# Altium PCB dimmer_v2.PcbDoc
Units mm, origin at the board's own origin, x right, y up, seen from the top; angles counter-clockwise.
Board outline 32.8 x 86.9 mm, 4 copper layers (Top Layer, Layer 2, Layer 3, Bottom Layer), stack 1.369 mm thick; 45 components, 35 nets, 167 pads, 18 vias.
Unrouted connection lines stored in the file: 68.
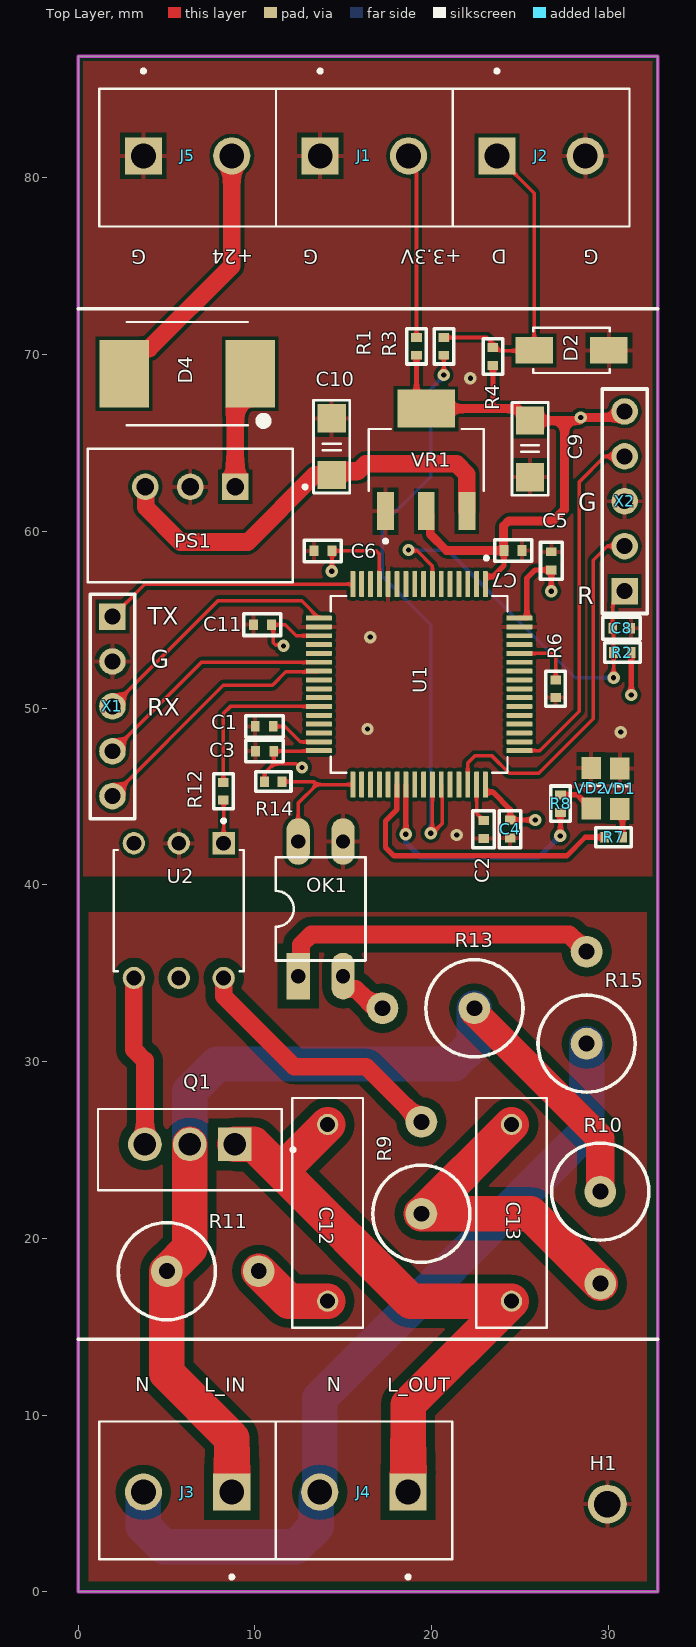
[diagram p0: Top Layer view]
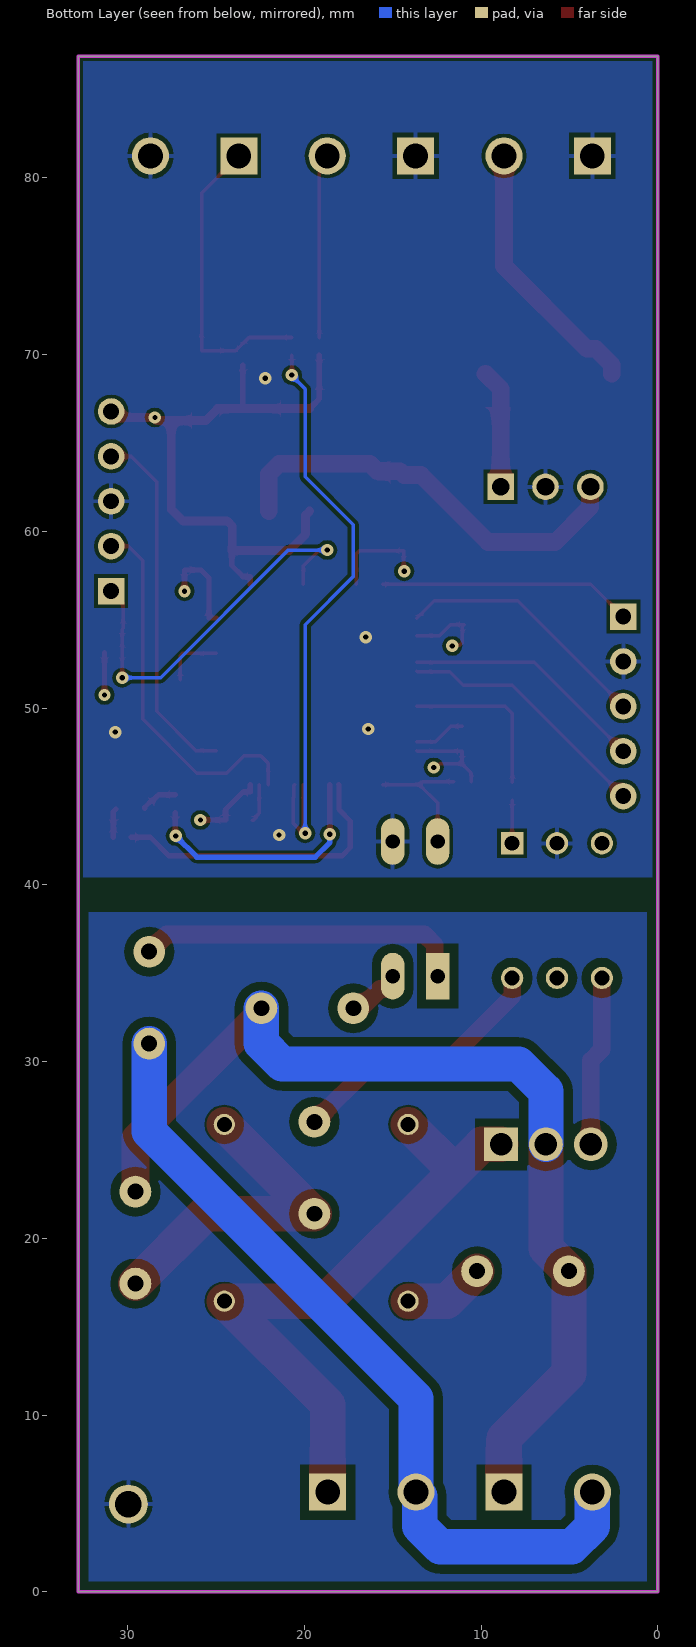
[diagram p1: Bottom Layer view, seen from below]
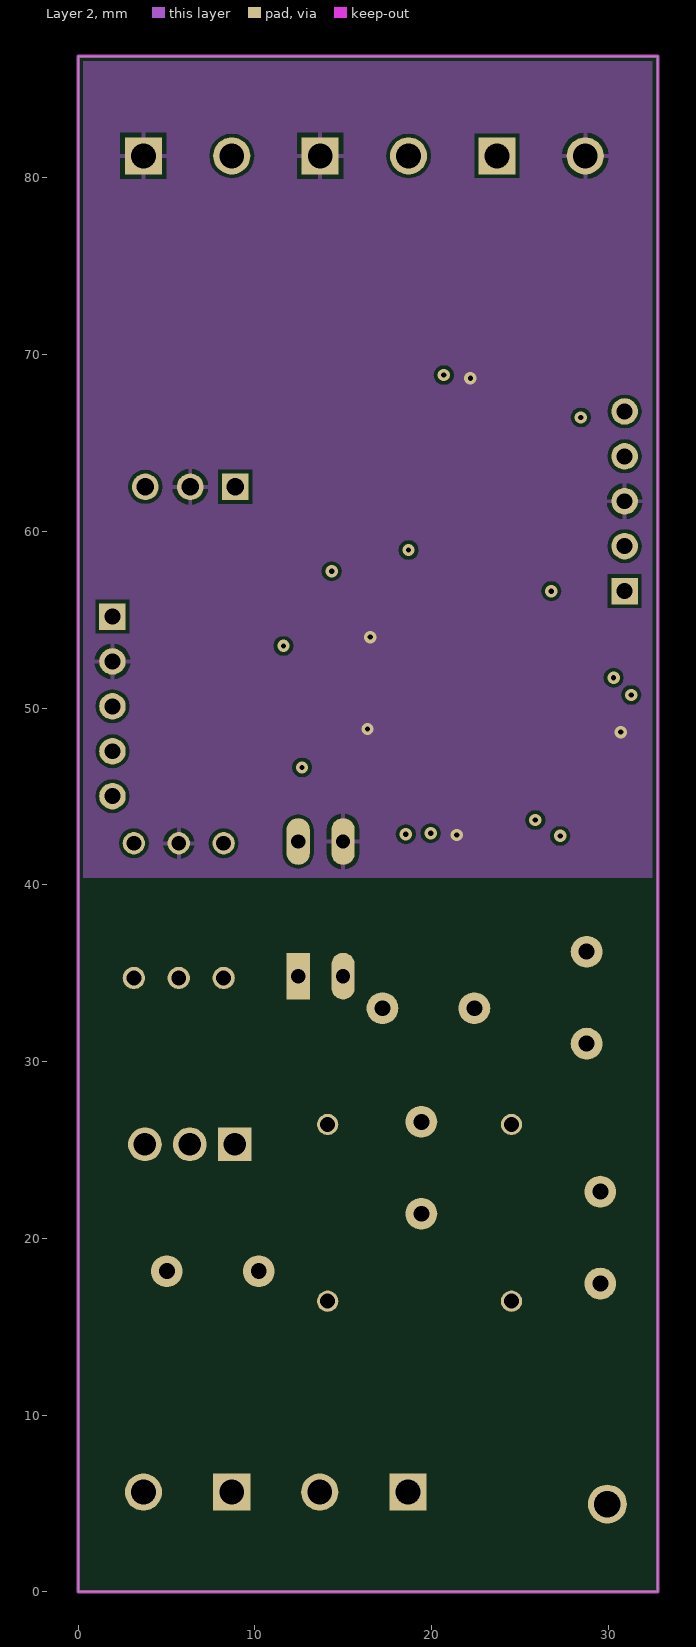
[diagram p2: Layer 2]
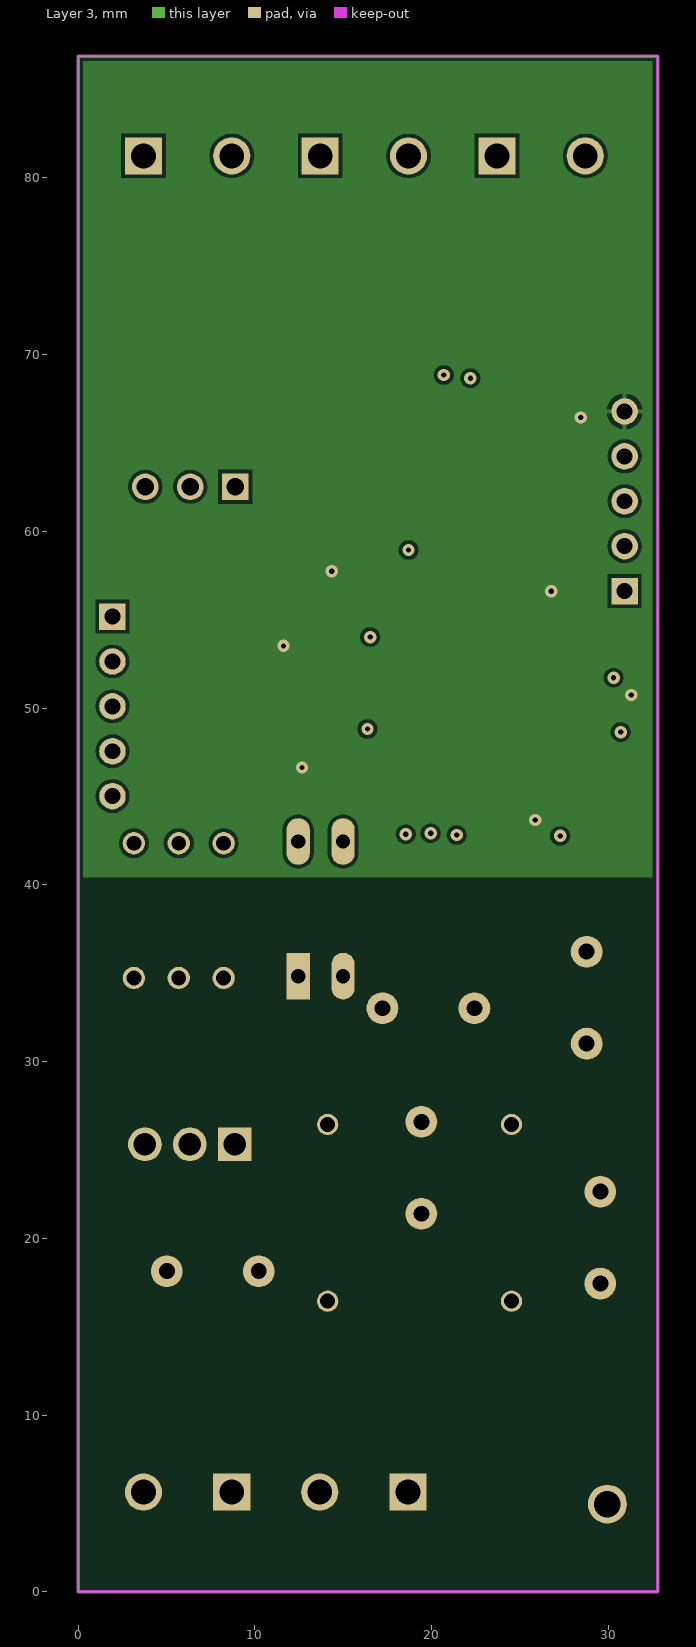
[diagram p3: Layer 3]

## Layer stack, top to bottom
Top Solder: solder mask 0.0254, SM-001, Dk 4
Top Layer: signal copper 0.035
Dielectric 1: prepreg 0.1295, PP-017, Dk 4.3
Dielectric 2: prepreg 0.1295, PP-017, Dk 4.3
Layer 2: signal copper 0.035
Dielectric 3: core 0.7112, Core-039, Dk 4.8
Layer 3: signal copper 0.035
Dielectric 4: prepreg 0.1295, PP-017, Dk 4.3
Dielectric 5: prepreg 0.1295, PP-017, Dk 4.3
Bottom Layer: signal copper 0.035
Bottom Solder: solder mask 0.0254, SM-001, Dk 4

## Board outline
0,0 0,86.9 32.8,86.9 32.8,0

## Design rules (kind name [scope] priority, off if disabled: settings)
Clearance Clearance_1 [InNet('pwr_gnd')] p1: gap=0.5 ignorepadtopadclearanceinfootprint=FALSE
Clearance [All] p2: gap=0.2 ignorepadtopadclearanceinfootprint=FALSE
ComponentClearance [InComponentClass('J*') vs InComponentClass('J*')] p1: gap=0.01 collisioncheckmode=3 verticalgap=0.01 showdistances=FALSE
DiffPairsRouting [All] p1: maxlimit=0.254 minlimit=0.2 mostfreqgap=0.254 toplayer_minwidth=0.25 toplayer_maxwidth=0.381 toplayer_prefwidth=0.381 midlayer1_minwidth=0.25 midlayer1_maxwidth=0.381 midlayer1_prefwidth=0.381 midlayer2_minwidth=0.25 midlayer2_maxwidth=0.381 midlayer2_prefwidth=0.381 bottomlayer_minwidth=0.25 bottomlayer_maxwidth=0.381 bottomlayer_prefwidth=0.381 maxuncoupledlength=12.7
HoleSize [All] p1: absolutevalues=TRUE maxlimit=5 minlimit=0.025 maxpercent=80.000 minpercent=20.000
MatchedLengths [InNetClass('RMII')] p1: tolerance=0.5 checknetsindiffpair=FALSE checkdiffpairvsdiffpair=TRUE checkxsignals=TRUE checkothers=TRUE
MinimumSolderMaskSliver [All] p1: minsoldermaskwidth=0
PolygonConnect [All] p1: connectstyle=Relief reliefconductorwidth=0.254 reliefentries=4 polygonreliefangle="90 Angle" airgapwidth=0.254
RoutingVias [All] p1: holewidth=0.3 width=1 viastyle="Through Hole" minholewidth=0.3 minwidth=0 maxholewidth=1 maxwidth=4
SilkToSolderMaskClearance [IsPad] p1: minsilkscreentomaskgap=0.1 clearancetoexposedcopper=TRUE
SolderMaskExpansion [All] p1: expansion=0.102 istentingtop=FALSE
UnRoutedNet [All] p1: checkbadconnections=TRUE
Width [All] p1: maxlimit=4 minlimit=0.15 preferedwidth=0.254
24 further rules are at their usual default settings.

## Components (designator, comment, footprint, x,y, rotation, side; value= is the part's Value field where it differs from the comment)
C1 "0402 2.2uF" "CAPACITOR 0402" 10.05,48.975 r0 top
C2 "0402 2.2uF" "CAPACITOR 0402" 22.95,42.65 r90 top
C3 "0402 0.1 uF" "CAPACITOR 0402" 11.05,47.575 r180 top
C4 "0402 0.1 uF" "CAPACITOR 0402" 24.45,43.65 r270 top
C5 "0402 0.1 uF" "CAPACITOR 0402" 26.775,57.85 r90 top
C6 "0402 0.1 uF" "CAPACITOR 0402" 14.35,58.9 r180 top
C7 "0402 0.1 uF" "CAPACITOR 0402" 24.125,58.925 r0 top
C8 "0402 0.1 uF" "CAPACITOR 0402" 31.25,54.525 r180 top
C9 "1206  4.7uF 16v" "CAPACITOR 1206" 25.575,66.275 r270 top
C10 "1206  4.7uF 16v" "CAPACITOR 1206" 14.35,63.2 r90 top
C11 "0402 0.1 uF" "CAPACITOR 0402" 10.925,54.725 r180 top
C12 "0.01 B32521C6103J000" CAPRR1000W60L1300T400H900 14.125,21.45 r270 top
C13 "0.047 B32520C6473J000" CAPRR1000W60L1300T400H900 24.525,21.45 r270 top
D2 "SMAJ36CA" DIOM4325X250N 27.925,70.25 r0 top
D4 "MBRS540T3G" DIOM7958X213N 6.175,68.925 r180 top
H1 "Hole" "Hole 1.5" 29.95,4.975 r0 top
J1 "KLS2-128I-5.00-02P-4S" CUI_TB003-500-P02BE 13.7,81.25 r0 top
J2 "KLS2-128I-5.00-02P-4S" CUI_TB003-500-P02BE 23.7,81.25 r0 top
J3 "KLS2-128I-5.00-02P-4S" CUI_TB003-500-P02BE 8.7,5.65 r180 top
J4 "KLS2-128I-5.00-02P-4S" CUI_TB003-500-P02BE 18.675,5.65 r180 top
J5 "KLS2-128I-5.00-02P-4S" CUI_TB003-500-P02BE 3.7,81.25 r0 top
OK1 "PC814" DIL04 13.725,38.65 r0 top
PS1 "K7805-500R3" CONV_K7805-500R3 6.35,60.9 r180 top
Q1 "BTA06-600BRG" TO254P1040X460X1975-3 8.865,25.325 r180 top
R1 "0402 10 R" "Resistor 0402" 19.15,70.975 r270 top
R2 "0402 10K" "Resistor 0402" 30.3,53.15 r0 top
R3 "0402 10 R" "Resistor 0402" 20.7,70.975 r270 top
R4 "0402 10K" "Resistor 0402" 23.475,69.4 r90 top
R6 "0402 10K" "Resistor 0402" 27.025,51.6 r270 top
R7 "0402 3K" "Resistor 0402" 29.8,42.7 r0 top
R8 "0402 3K" "Resistor 0402" 27.3,44.1 r90 top
R9 "200 R 0.5w 5%" "MF-200 V" 19.425,24 r270 top
R10 "680 R 0.5w 5%" "MF-200 V" 29.55,20.05 r90 top
R11 "47 R 0.5w 5%" "MF-200 V" 7.625,18.15 r180 top
R12 "0402 430 R" "Resistor 0402" 8.225,44.8 r90 top
R13 "75 kOm 0.5w 5%" "MF-200 V" 19.825,33.025 r0 top
R14 "0402 10K" "Resistor 0402" 11.55,45.85 r180 top
R15 "75 kOm 0.5w 5%" "MF-200 V" 28.775,33.625 r270 top
U1 "STM32F405RGT6" QFP50P1200X1200X160-64N 19.3,51.35 r270 top
U2 "MOC3023" DIP762W48P254L889H508Q6 5.7,38.55 r270 top
VD1 "0805 Green" 0805- 30.65,44.3 r90 top
VD2 "0805 Green" 0805- 29.025,44.325 r90 top
VR1 "LM1117MPX-3.3" VREG_LM1117MPX-3.3 19.7,64.05 r90 top
X1 "PLS-5 2.54" PLS-5-3D 1.95,55.185 r270 top
X2 "PLS-5 2.54" PLS-5-3D 30.925,56.63 r90 top

## Footprints (in the part's own frame and the unit in brackets; to place one, negate y for a bottom-side part, rotate by r counter-clockwise, add the part's x,y. Pads: shape width x height; smd on the part's side, far side on the other; paste and mask are expansions set on the pad)
0805- [mm]
  rect 1.25x1.1 smd mask+0.06: A(0,0) K(2.3,0)
  silkscreen extent 1.33,-0.5 1.33,0.5, body extent 0.12,-0.62 2.14,0.63, height 1.1
"CAPACITOR 0402" [mm]
  rect 0.5x0.6 smd: 1(-0.025,0) 2(1,0)
  silkscreen extent -0.55,-0.61 1.55,0.61, body extent -0.01,-0.28 1.01,0.28, height 0.55
"CAPACITOR 1206" [mm]
  rect 1.6x1.6 smd: 1(0,0) 2(3.2,0)
  silkscreen extent -1.02,-1.02 4.23,1.02, body extent 0.01,-0.8 3.22,0.8, height 1.26
CAPRR1000W60L1300T400H900 [mm]
  round 1.2 hole 0.85: 1(-5,0) 2(5,0)
  silkscreen extent -6.5,-2 6.5,2, body extent -6.5,-2.03 6.5,1.97, height 7
CONV_K7805-500R3 [mm]
  rect 1.508x1.508 hole 1: 1(-2.54,-1.625)
  round 1.508 hole 1: 2(0,-1.625) 3(2.54,-1.625)
  silkscreen extent -6.6,-3.77 5.8,3.77, body extent -5.8,-3.77 5.8,3.77, height 10.16
CUI_TB003-500-P02BE [mm]
  rect 2.1x2.1 hole 1.4: 1(0,0)
  round 2.1 hole 1.4: 2(5,0)
  silkscreen extent -2.5,-4 7.5,4.9
DIL04 [mil]
  rect 52x104 hole 32: 1(-50,-150)
  oval 52x104 hole 32: 2(50,-150) 3(50,150) 4(-50,150)
  silkscreen extent -100,-115 100,115
DIOM4325X250N [mm]
  rect 2.12x1.5 smd: 1(-2.115,0) 2(2.115,0)
  silkscreen extent -2.16,-1.28 2.16,1.28
DIOM7958X213N [mil]
  rect 110x150 smd: A(140.49,0) C(-140.49,0)
  silkscreen extent -176,-115 135,115
DIP762W48P254L889H508Q6 [mm]
  rect 1.26x1.26 / inner round 1.26 / far side rect 1.26x1.26 hole 0.84: 1(-3.81,2.54)
  round 1.26 hole 0.84: 2(-3.81,0) 3(-3.81,-2.54) 4(3.81,-2.54) 5(3.81,0) 6(3.81,2.54)
  silkscreen extent -5.18,-3.68 3.43,3.68, body extent -4.4,-3.56 4.4,3.56, height 4.8
"Hole 1.5" [mm]
  round 2.2 hole 1.5: 0(0,0)
"MF-200 V" [mm] "Resistor 2W"
  round 1.8 hole 0.9 mask+0.06: 1(-2.6,0) 2(2.6,0)
  silkscreen extent -0.15,-2.75 5.35,2.75, body extent -3,-2.75 5.35,2.75, height 19.9
PLS-5-3D [mm] "Connector; Header; 5 Position"
  rect 1.5x1.5 hole 0.9: 1(0,0)
  round 1.5 hole 0.9: 2(2.54,0) 3(5.08,0) 4(7.62,0) 5(10.16,0)
  silkscreen extent -1.27,-1.27 11.43,1.27, body extent -1.27,-1.27 11.43,1.27, height 8.44
QFP50P1200X1200X160-64N [mm]
  rrect25% 1.47x0.28 smd: 1(-5.67,3.75) 2(-5.67,3.25) 3(-5.67,2.75) 4(-5.67,2.25) 5(-5.67,1.75) 6(-5.67,1.25) 7(-5.67,0.75) 8(-5.67,0.25) 9(-5.67,-0.25) 10(-5.67,-0.75) 11(-5.67,-1.25) 12(-5.67,-1.75) 13(-5.67,-2.25) 14(-5.67,-2.75) 15(-5.67,-3.25) 16(-5.67,-3.75) 33(5.67,-3.75) 34(5.67,-3.25) 35(5.67,-2.75) 36(5.67,-2.25) 37(5.67,-1.75) 38(5.67,-1.25) 39(5.67,-0.75) 40(5.67,-0.25) 41(5.67,0.25) 42(5.67,0.75) 43(5.67,1.25) 44(5.67,1.75) 45(5.67,2.25) 46(5.67,2.75) 47(5.67,3.25) 48(5.67,3.75)
  rrect25% 0.28x1.47 smd: 17(-3.75,-5.67) 18(-3.25,-5.67) 19(-2.75,-5.67) 20(-2.25,-5.67) 21(-1.75,-5.67) 22(-1.25,-5.67) 23(-0.75,-5.67) 24(-0.25,-5.67) 25(0.25,-5.67) 26(0.75,-5.67) 27(1.25,-5.67) 28(1.75,-5.67) 29(2.25,-5.67) 30(2.75,-5.67) 31(3.25,-5.67) 32(3.75,-5.67) 49(3.75,5.67) 50(3.25,5.67) 51(2.75,5.67) 52(2.25,5.67) 53(1.75,5.67) 54(1.25,5.67) 55(0.75,5.67) 56(0.25,5.67) 57(-0.25,5.67) 58(-0.75,5.67) 59(-1.25,5.67) 60(-1.75,5.67) 61(-2.25,5.67) 62(-2.75,5.67) 63(-3.25,5.67) 64(-3.75,5.67)
  silkscreen extent -7.24,-5 5,5, body extent -6,-5.97 6,6.03, height 1.6
"Resistor 0402" [mm]
  rect 0.5x0.6 smd: 1(0,0) 2(1,0)
  silkscreen extent -0.5,-0.55 1.5,0.55, body extent 0,-0.28 1,0.27, height 0.46
TO254P1040X460X1975-3 [mm]
  rect 1.91x1.91 hole 1.27: 1(0,0)
  round 1.91 hole 1.27: 2(2.54,0) 3(5.08,0)
  silkscreen extent -3.4,-2 7.74,2.6
VREG_LM1117MPX-3.3 [mm]
  rect 2.15x0.95 smd: 1(-2.9,2.3) 2(-2.9,0) 3(-2.9,-2.3)
  rect 2.15x3.25 smd: 4(2.9,0)
  silkscreen extent -4.7,-3.25 1.75,3.25, body extent -3.5,-3.25 3.5,3.25, height 1.8

## Part data
C1 C2: library part Capasitor, "Ceramic Capacitor SMD", Package=0402
C3 C4 C5 C6 C7 C8 C11: library part Capasitor, "Ceramic Capacitor", Package=0402
C9 C10: library part Capasitor, "Ceramic Capacitor", Package=1206
C12 C13: library part HV_CAP, Package=B32521C6103J000
D2: Package=DIOM4325x250N, Availability=Unavailable, MP=SMAJ36CA, Price=None
D4: "Diode Schottky 40V 5A Surface Mount SMC", Package="DO-214 ON Semiconductor", Availability=Unavailable, MF="ON Semiconductor", MP=MBRS540T3G, Price=None, SnapEDA_Link=https://www.snapeda.com/parts/MBRS540T3G/ON%20Semiconductor/view-part/78777/?ref=snap
J1 J2 J3 J4 J5: library part TB003-500-P02BE, "2~24 Poles, Screw Type, Horizontal, 5.0 Pitch, 26~14 _AWG_, Terminal Block Connector", Package=None, Availability=Unavailable, MF="CUI Devices", MP=TB003-500-P02BE, Price=None, SnapEDA_Link=https://www.snapeda.com/parts/TB003-500-P02BE/CUI%20Devices/view-part/3590637/?ref=snap
OK1: "#10-32 Round Head Machine Screw Slotted Drive Nylon", Package="DIP-4 Sharp", Availability=Unavailable, MF="Essentra Components", MP=PC814, Price=None, SnapEDA_Link=https://www.snapeda.com/parts/PC814/Essentra%20Components/view-part/624045/?ref=snap
PS1: "Linear Regulator Replacement DC DC Converter 1 Output 5V, -5V - - - 500mA, 300mA 6.5V, 7V - 36V, 31V Input", Package="SIP-3-3 MORNSUN", Availability="In Stock", Check_prices=https://www.snapeda.com/parts/K7805-500R3/MORNSUN/view-part/?ref=eda, MF=MORNSUN, MP=K7805-500R3, Price=None, Purchase-URL=https://pricing.snapeda.com/search/part/K7805-500R3/?ref=eda, SnapEDA_Link=https://www.snapeda.com/parts/K7805-500R3/MORNSUN/view-part/?ref=snap
Q1: "TRIAC Standard 600V 6A Through Hole TO-220AB", Package="TO-220 STMicroelectronics", Availability=Unavailable, MF=STMicroelectronics, MP=BTA06-600BRG, Price=None, SnapEDA_Link=https://www.snapeda.com/parts/BTA06-600BRG/STMicroelectronics/view-part/107180/?ref=snap
R1 R2 R3 R4 R6 R7 R8 R12 R14: library part Resistor, "Resistor", Package=0402
R9 R10 R11 R13 R15: library part Res, "Резистор", Power_W={Power_W}, Tolerance_Percent={Tolerance_Percent}, Body={Body}, Class="Электронные компоненты", Installation={Installation}, Ordering_Information={Ordering_Information}, Pins=2, SubClass=Резисторы
U1: "High-performance foundation line, ARM Cortex-M4 core with DSP and FPU, 1 Mbyte Flash, 168 MHz CPU, ART Accelerator", Package=None, Availability=Unavailable, MP=STM32F405RGT6, Price=None
U2: "Optoisolator Triac Output 5300Vrms 1 Channel 6-DIP", Package="DIP-6 Texas Instruments", Availability="In Stock", Check_prices=https://www.snapeda.com/parts/MOC3023/Onsemi/view-part/?ref=eda, MF="ON Semiconductor", MP=MOC3023, Price=None, Purchase-URL=https://pricing.snapeda.com/search/part/MOC3023/?ref=eda, SnapEDA_Link=https://www.snapeda.com/parts/MOC3023/Onsemi/view-part/?ref=snap
VD1 VD2: library part "LED SMD", "Green", Package=0805, CompType=LED, Note=Read, Pins=2
VR1: "800-mA 3.3-V linear voltage regulator", Package="SOT-223-4 Texas Instruments", Availability="In Stock", Check_prices=https://www.snapeda.com/parts/LM1117MPX-3.3/Texas+Instruments/view-part/?ref=eda, MF="Texas Instruments", MP=LM1117MPX-3.3, Price=None, Purchase-URL=https://pricing.snapeda.com/search/part/LM1117MPX-3.3/?ref=eda, SnapEDA_Link=https://www.snapeda.com/parts/LM1117MPX-3.3/Texas+Instruments/view-part/?ref=snap
X1 X2: library part PLS-5, "Header, 5-Pin", Package="2.54 x 5", CompType=connector, Note="header pins 2.54mm x 5", PartNumber=PLS-5, Pins=5

## Via types
v1: diameter 0.7, hole 0.3, Top Layer to Bottom Layer, tented both sides, 18 vias

## Nets (pads, with @x,y where several pads share a name; then routed paths per layer and width w, separated by ;. In a path a pad name is that pad's centre, name@x,y a point inside that pad or via, vN(x,y) a via of type N, cw(c..) or ccw(c..) an arc to the next point about the centre after c; other vN are vias at no path point)
+3.3v: C3.1 C4.1 C5.1 C6.1 C7.1 C9.1 C11.1 R1.2 R2.2 R4.1 R14.2 U1.1 U1.13 U1.19 U1.32 U1.48 U1.64 VR1.2 VR1.4 X2.5 | length 64.8
  Top Layer w0.2: R14.2 10.558,45.858 10.558,46.333 11.075,46.85 ; v1(11.625,53.525) 11.564,53.586 11.167,53.586 11.05,53.704 11.05,54.625 C11.1 11.725,54.725 12.35,54.1 U1.19 ; v1(12.675,46.65) 12.54,46.65 12.34,46.85 11.075,46.85 ; U1.32 13.605,47.575 C3.1 11.075,46.85 ; v1(14.35,57.75) 14.375,57.775 C6.1 16.875,58.9 17.05,58.725 U1.13
  Top Layer w0.3: R1.2 19.15,67.5 VR1.4 ; U1.48 23.05,45.266 23.06,45.256 23.474,45.256 24.45,44.28 C4.1 v1(25.875,43.675) ; U1.1 23.05,57.434 23.06,57.444 23.474,57.444 24.1,58.07 C7.1 ; R4.1 23.475,67.05 23.575,66.95 ; U1.64 25.384,55.1 25.394,55.11 25.394,57.369 25.85,57.825 C5.1 v1(26.775,56.625) ; v1(31.3,50.75) R2.2
  Top Layer w0.5: VR1.2 19.925,60.925 19.925,59.85 20.85,58.925 C7.1 24.1,59.121 24.075,59.146 24.075,60.307 24.368,60.6 26.875,60.6 27.525,61.25 27.525,66.275 ; VR1.4 23.575,66.95 24.9,66.95 C9.1 27.525,66.275 ; X2.5 30.654,66.79 30.314,66.45 28.525,66.45 28.35,66.275 27.525,66.275
  other v1: 28.45,66.45
+5v: C10.1 PS1.3 VR1.3 | length 24.3
  Top Layer w1: PS1.3 3.836,62.499 3.836,61.364 5.8,59.4 9.6,59.4 13.4,63.2 C10.1 14.561,63.411 15.861,63.411 16.275,63.825 21.414,63.825 22,63.239 VR1.3
+24v: D4.C PS1.1 | length 6.8
  Top Layer w1: PS1.1 8.89,68.072 D4.C
B1: U1.22 X1.4 | length 13.8
  Top Layer w0.2: X1.4 6.985,52.6 U1.22
B2: U1.23 X1.5 | length 14.6
  Top Layer w0.2: X1.5 8.225,51.3 11,51.3 11.76,52.06 13.59,52.06 U1.23
CTR: R12.2 U1.27 | length 9.5
  Top Layer w0.2: R12.2 8.225,49.7 8.625,50.1 U1.27
GND: C1.1 C2.1 C3.2 C4.2 C5.2 C6.2 C7.2 C8.1 C9.2 C10.2 C11.2 D2.2 J1.1 J2.2 J5.1 OK1.3 PS1.2 R6.2 U1.12 U1.18 U1.63 U2.2 VD1.K VD2.K VR1.1 X1.2 X2.3
  other v1: 21.425,42.825 30.7,48.65 16.375,48.825 16.525,54.025 22.2,68.675
L: J3.1 Q1.2 R10.2 R11.2 R13.2 | length 57.3
  Top Layer w1.6: R13.2 22.425,32.8 29.55,25.675 R10.2
  Top Layer w2: Q1.2 6.325,19.45 R11.2 5.025,12.375 8.7,8.7 J3.1
  Bottom Layer w2: Q1.2 6.325,28.325 7.875,29.875 21.253,29.875 22.425,31.047 R13.2
M1_BOOT: R6.1 U1.60 | length 3.5
  Top Layer w0.2: U1.60 26.9,53.1 27.025,52.975 R6.1
M1_LED: R7.1 U1.38 | length 16.9
  Top Layer w0.3: U1.38 18.04,45.67 18.04,44.265 17.4,43.625 17.4,42.125 17.875,41.65 27.65,41.65 28.7,42.7 R7.1
M1_LED1: R8.1 U1.39 | length 14.2
  Top Layer w0.3: v1(18.55,42.875) U1.39 ; v1(27.275,42.775) 27.3,42.8 R8.1
  Bottom Layer w0.3: v1(18.55,42.875) 18.55,42.401 19.376,41.575 26.075,41.575 v1(27.275,42.775)
M1_NRST: C8.2 R2.1 U1.7 X2.1 | length 22.6
  Top Layer w0.2: v1(18.7,58.95) 18.735,58.915 19.185,58.915 20.05,58.05 U1.7 ; v1(30.3,51.725) R2.1 30.3,54.475 C8.2 30.25,55.955 X2.1
  Bottom Layer w0.2: v1(18.7,58.95) 20.9,58.95 28.125,51.725 v1(30.3,51.725)
M1_SWCLK: U1.49 X2.4 | length 20.5
  Top Layer w0.2: U1.49 26.125,47.6 28.35,49.825 28.35,62.8 29.8,64.25 X2.4
M1_SWDIO: U1.46 X2.2 | length 21.2
  Top Layer w0.2: U1.46 22.05,46.9 22.45,47.3 23.425,47.3 24.4,46.325 26.075,46.325 29.15,49.4 29.15,58.375 29.945,59.17 X2.2
N: J3.2 J4.2 R15.2 | length 46.3
  Bottom Layer w2: J3.2 3.7,3.722 4.872,2.55 12.303,2.55 13.475,3.722 13.475,5.423 13.675,5.623 J4.2 13.675,10.95 28.775,26.05 R15.2
NetC1_2: C1.2 U1.31 | length 2.9
  Top Layer w0.2: C1.2 11.7,48.975 12.575,48.1 U1.31
NetC2_2: C2.2 U1.47 | length 2.2
  Top Layer w0.2: U1.47 22.55,44.05 22.75,43.85 22.75,43.8 22.9,43.65 C2.2
NetC12_1: C12.1 C13.2 J4.1 Q1.1 | length 36.4
  Top Layer w2: Q1.1 9.95,25.325 11.562,23.713 ; C12.1 11.562,23.887 11.562,23.713 ; J4.1 18.675,10.6 C13.2 18.825,16.45 11.562,23.713
NetC12_2: C12.2 R11.1 | length 4.6
  Top Layer w2: R11.1 11.925,16.45 C12.2
NetC13_1: C13.1 R9.2 R10.1 | length 18.9
  Top Layer w2: R9.2 R9.2@19.475,21.4 ; C13.1 R9.2@19.475,21.4 ; R10.1 25.6,21.4 R9.2@19.475,21.4
NetD2_1: D2.1 J2.1 R3.1 R4.2 | length 17.3
  Top Layer w0.2: R3.1 23.125,70.975 23.875,70.225 25.785,70.225 D2.1 25.81,79.14 J2.1
NetD4_A: D4.A J5.2 | length 15.1
  Top Layer w1: D4.A 2.606,69.433 3.503,70.33 4.011,70.33 8.7,75.019 J5.2
NetJ1_2: J1.2 R1.1 | length 10.5
  Top Layer w0.2: J1.2 18.7,80.736 19.15,80.286 R1.1
NetOK1_1: OK1.1 R15.1 | length 18.6
  Top Layer w1: OK1.1 12.611,34.996 12.611,36.614 13.197,37.2 27.789,37.2 28.764,36.225 R15.1
NetOK1_2: OK1.2 R13.1 | length 3.3
  Top Layer w1: OK1.2 14.995,34.266 15.143,34.118 15.717,34.118 16.657,33.178 17.072,33.178 R13.1
NetQ1_3: Q1.3 U2.4 | length 9.7
  Top Layer w1: U2.4 3.16,30.69 3.785,30.065 Q1.3
NetR7_2: R7.2 VD1.A | length 1.7
  Top Layer w0.3: VD1.A 30.8,44.15 R7.2
NetR8_2: R8.2 VD2.A | length 2.1
  Top Layer w0.3: R8.2 28.25,45.1 28.55,44.8 28.625,44.8 29.025,44.4 VD2.A
NetR9_1: R9.1 U2.6 | length 15.2
  Top Layer w1: U2.6 8.24,33.71 12.225,29.725 16.3,29.725 R9.1
NetR12_1: R12.1 U2.1 | length 2.4
  Top Layer w0.2: R12.1 8.24,44.785 U2.1
pwr_gnd: H1.0
RX: R3.2 U1.42 U1.43 | length 35.4
  Top Layer w0.2: v1(19.95,42.925) 20.057,42.925 20.61,43.478 20.61,44.928 20.59,44.948 20.59,45.64 U1.43 ; v1@20.046,43.021 20.046,43.238 20.05,43.242 U1.42 ; v1(20.7,68.85) R3.2
  Bottom Layer w0.2: v1(19.95,42.925) 19.95,54.725 17.225,57.45 17.225,60.375 19.95,63.1 19.95,68.058 20.7,68.808 v1(20.7,68.85)
RX_BUS: U1.17 X1.3 | length 14.6
  Top Layer w0.2: X1.3 5.545,53.7 7.92,56.075 12.655,56.075 U1.17
TX_BUS: U1.16 X1.1 | length 14.4
  Top Layer w0.2: X1.1 2.6,55.835 3.785,57.02 U1.16
Zc_INT: OK1.4 R14.1 U1.33 | length 7.7
  Top Layer w0.2: R14.1 13.328,45.85 13.498,45.68 ; OK1.4 12.455,44.637 13.498,45.68 ; U1.33 13.92,45.68 13.498,45.68
pads on no net: U1.2 U1.3 U1.4 U1.5 U1.6 U1.8 U1.9 U1.10 U1.11 U1.14 U1.15 U1.20 U1.21 U1.24 U1.25 U1.26 U1.28 U1.29 U1.30 U1.34 U1.35 U1.36 U1.37 U1.40 U1.41 U1.44 U1.45 U1.50 U1.51 U1.52 U1.53 U1.54 U1.55 U1.56 U1.57 U1.58 U1.59 U1.61 U1.62 U2.3 U2.5

## Polygon pours and split planes (outlines as drawn)
GND on Bottom Layer "GND" (solid, pour order 0): 0,40.45 32.8,40.45 32.8,86.9 0,86.9
pwr_gnd on Bottom Layer "GND" (solid, remove dead copper, pour order 5): 0,0 0,38.45 32.8,38.45 32.8,0
pwr_gnd on Top Layer "GND" (solid, remove dead copper, pour order 4): 0,0 0,38.45 32.8,38.45 32.8,0
GND on Top Layer "GND" (solid, remove dead copper, pour order 3): 0,40.5 32.8,40.5 32.8,86.9 0,86.9
+3.3v on Layer 3 "+3.3v" (solid, pour order 1): 0,40.45 32.8,40.45 32.8,86.9 0,86.9
GND on Layer 2 "GND" (solid, pour order 2): 0,40.4 32.8,40.4 32.8,86.9 0,86.9

## Keep-outs
Keep-Out Layer:
  the board outline again, w0.2

## Silkscreen, mask and mechanical layers (free items; w line width, h text height)
Top Overlay:
  lines w0.2: 0,14.3 32.8,14.3 ; 0,72.6 32.8,72.6
  text "G" at 3.85,75.95 h0.8 r180
  text "+24" at 9.9,75.95 h0.8 r180
  text "G" at 13.6,75.95 h0.8 r180
  text "+3.3V" at 21.7,75.95 h0.8 r180
  text "D" at 24.25,75.95 h0.8 r180
  text "G" at 29.45,75.95 h0.8 r180
  text "G" at 28.304,61.179 h1
  text "R" at 28.254,55.879 h1
  text "TX" at 3.954,54.729 h1
  text "G" at 4.104,52.279 h1
  text "RX" at 3.904,49.579 h1
  text "N" at 3.25,11.35 h0.8
  text "N" at 14.075,11.35 h0.8
  text "L_IN" at 7.15,11.317 h0.8
  text "L_OUT" at 17.5,11.317 h0.8